# Altium PCB ChassisPowerDistroA_PSoC_1.1_GK.PcbDoc (part 2 of 2)
Units mil, origin at the board's own origin, x right, y up, seen from the top; angles counter-clockwise.
Board outline 6000 x 4000 mil, 4 copper layers (Top Layer, Int1 (GND), Int2 (PWR), Bottom Layer), stack 55.4 mil thick; 197 components, 92 nets, 574 pads, 132 vias.
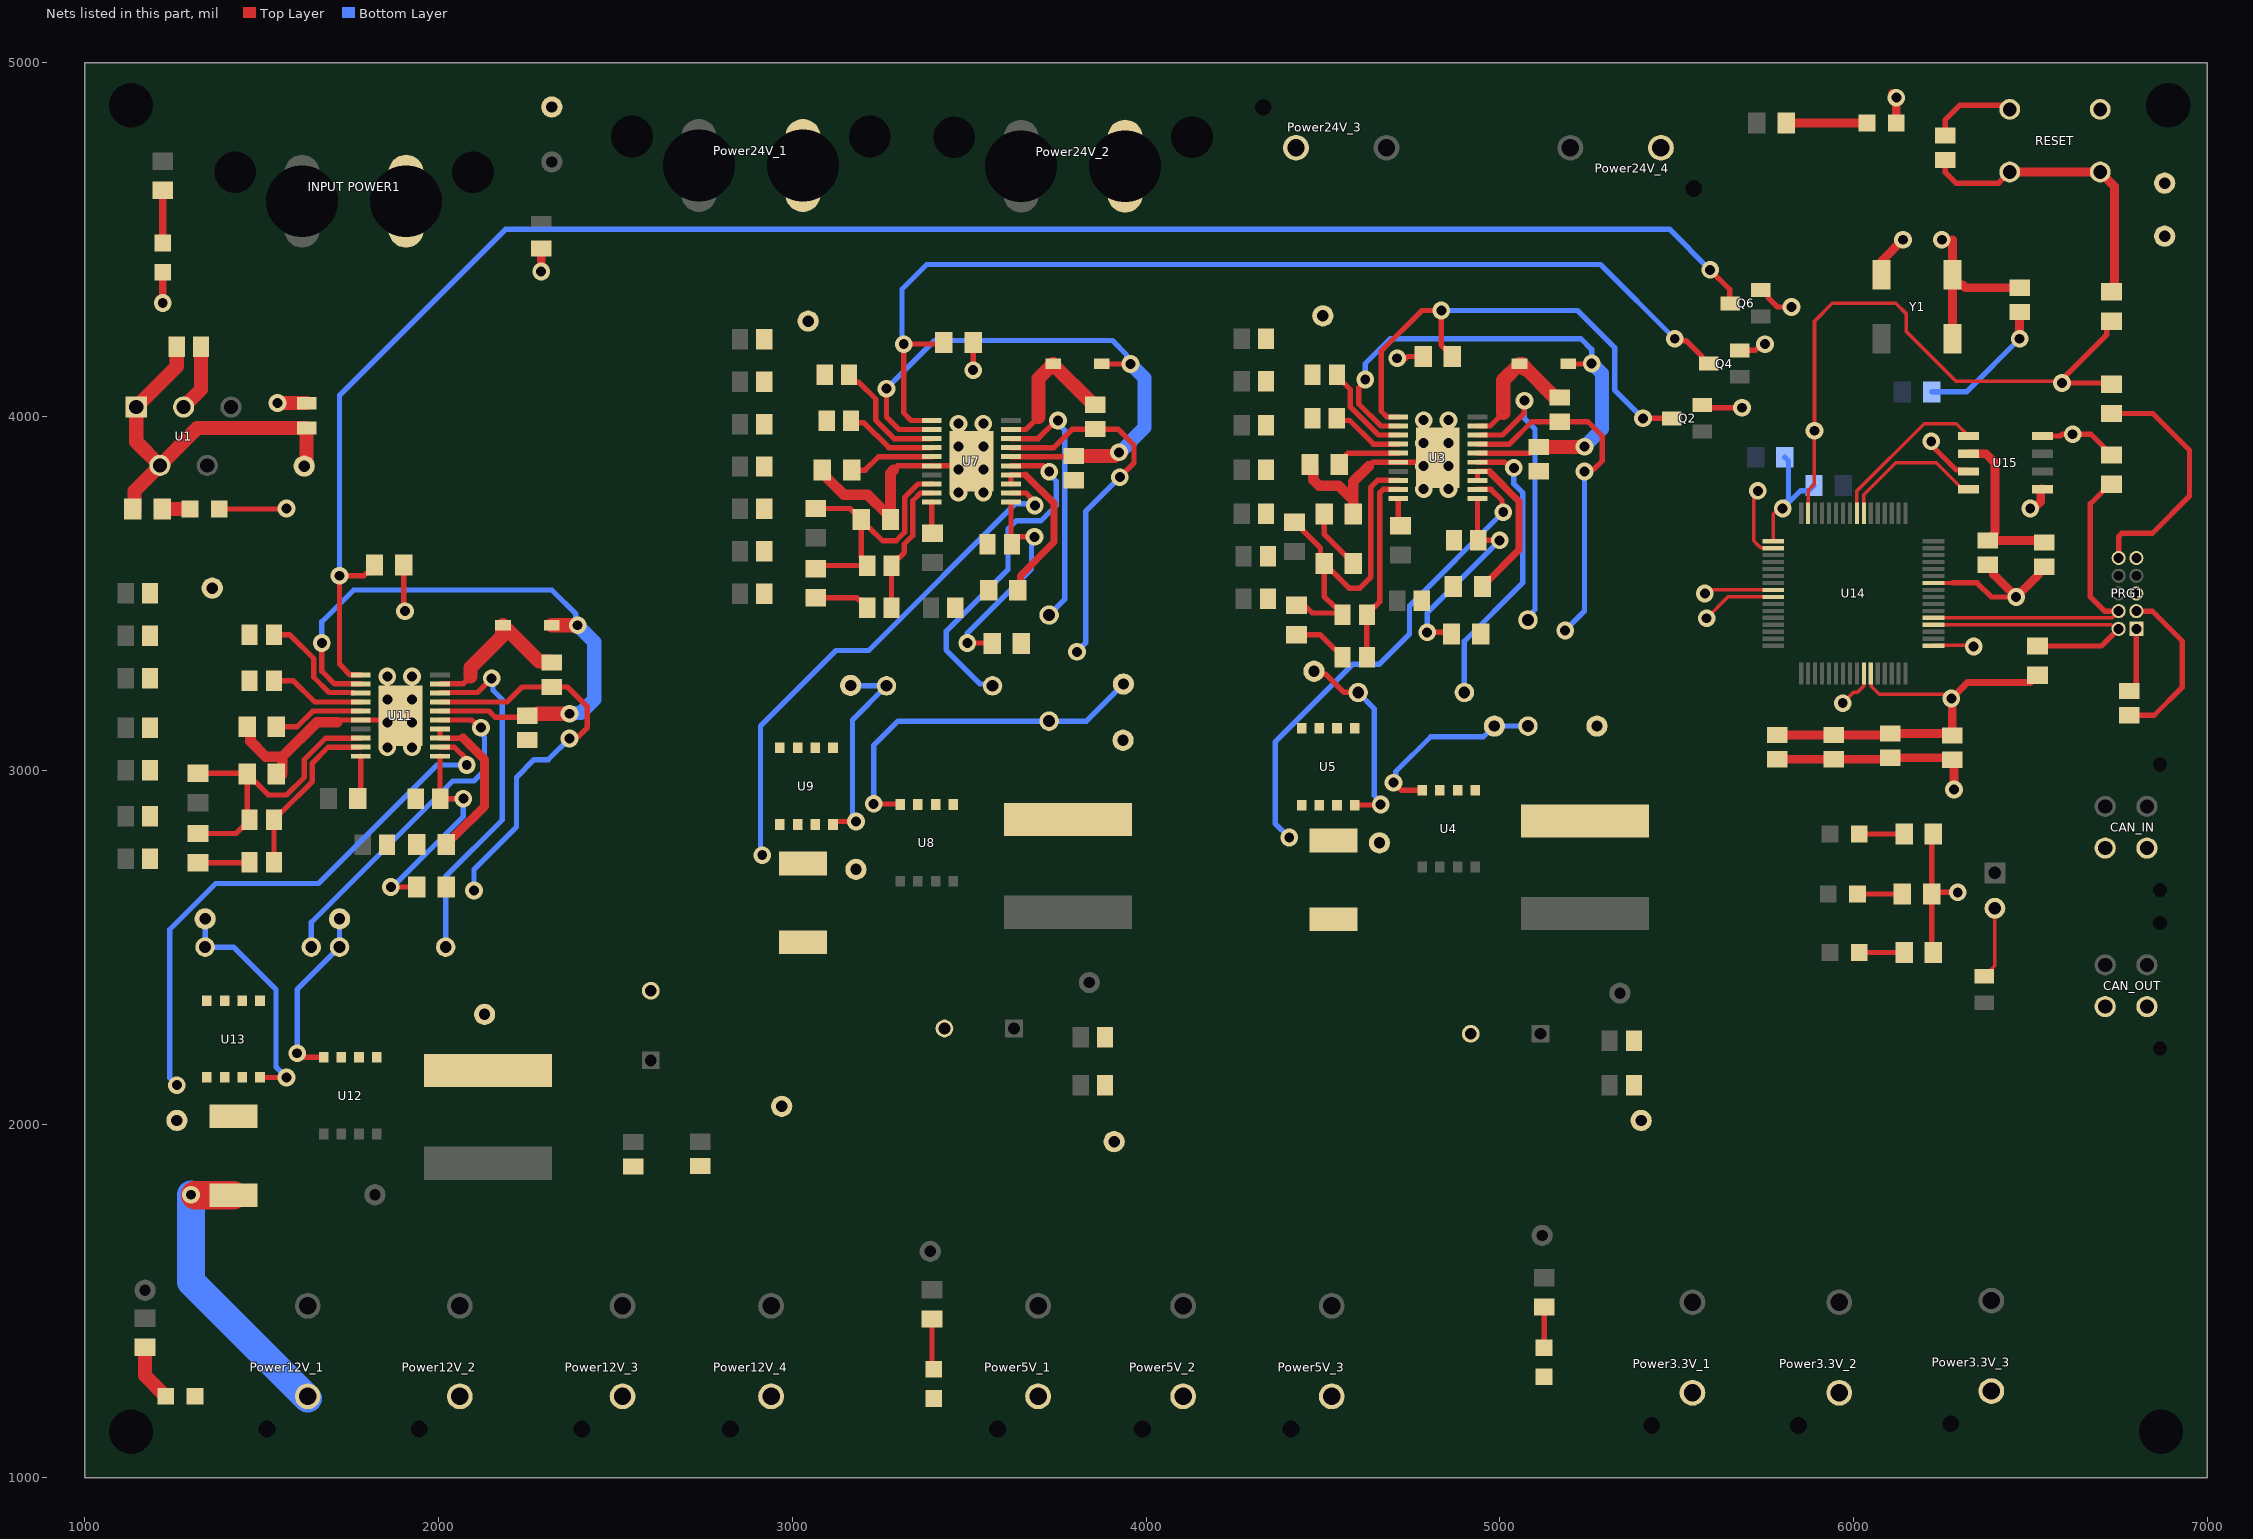
[diagram p4: the nets of this part, all layers, seen from the top]

## Via types
v1: diameter 50, hole 28, Top Layer to Bottom Layer, 132 vias

## Nets (pads, with @x,y where several pads share a name; then routed paths per layer and width w, separated by ;. In a path a pad name is that pad's centre, name@x,y a point inside that pad or via, vN(x,y) a via of type N, cw(c..) or ccw(c..) an arc to the next point about the centre after c; other vN are vias at no path point) (continued)
GND: 24V_OUT.NEG "INPUT POWER1.2" C1.1 C4.1 C5.1 C6.1 C7.1 C8.1 C9.1 C10.1 C12.1 C15.1 C16.1 C17.1 C22.1 C23.1 C24.1 C25.1 C26.1 C27.1 C28.1 C30.1 C33.1 C34.1 C35.1 C40.1 C41.1 C42.1 C43.1 C44.1 C45.1 C46.1 C50.1 C51.1 C52.1 C53.1 C56.2 C57.2 C58.2 C59.2 C60.1 C65.1 C66.1 C67.1 CAN_IN.1 CAN_OUT.1 GND.1 IN_P.NEG LP.NEG Power24V_1.2 Power24V_2.2 Power24V_3.2 Power24V_4.2 PRG1.3 PRG1.5 PRG1.9 Q2.2 Q4.2 Q6.2 R8.1 R10.1 R19.1 R21.1 R30.1 R33.1 R44.2 R46.1 R47.1 R48.1 R49.2 R50.2 R51.2 RESET.1 RESET.2 TP10.1 TP21.1 TP32.1 TP37.1 U1.3 U3.6 U3.21 U7.6 U7.21 U11.6 U11.21 U14.10 U14.17 U14.49 U14.57 U15.8 Y1.2 | length 5561
  Top Layer w10: v1(5585,3430) 5645.16,3490.16 U14.57@5773.62,3490.16 ; U14.49@5773.62,3647.64 5773.62,3723.62 5800,3750 v1(5800,3740) ; v1(5970,3190) 6000.4,3220.4 6011.42,3220.4 6028.75,3237.73 6028.75,3272.84 U14.10@6029.53,3273.62 ; U14.17@6226.38,3352.36 6227.16,3353.14 6336.86,3353.14 v1(6340,3350)
  Top Layer w15: LP.NEG@1379.68,3738.66 1568.66,3738.66 v1(1570,3740) ; R33.1@1458.66,3123 R33.1@1468.27,3113.39 ; 1713.98,3136.02 1720,3142.05 U11.6@1780,3142.05 1879.2,3142.05 U11.21@1892,3154.84 ; R21.1@3084.88,3848.94 3101.99,3831.83 R21.1@3101.99,3823.17 ; C33.1@3091.77,4118.94 C33.1@3097.32,4113.38 ; 3286.22,3848.94 3298.27,3860.98 U7.6@3394.22,3860.98 3493.43,3860.98 U7.21@3506.22,3873.78 ; C10.1@4340,3480.55 C10.1@4344.45,3485 ; R10.1@4463.66,3865 R10.1@4473.24,3855.42 ; 4630,3860 4640.98,3870.98 U3.6@4713,3870.98 4812.2,3870.98 U3.21@4825,3883.78 ; Q2.2@5573.31,4032.4 5580.71,4025 v1(5685,4025) ; Q4.2@5678.31,4187.4 5722.4,4187.4 5740,4205 v1(5750,4205) ; Q6.2@5738.31,4357.4 5746.18,4357.4 5758.37,4345.22 5758.37,4336.63 5785,4310 v1(5825,4310) ; C67.1@6260,4794.45 6260,4840 6300,4880 6430.63,4880 RESET.1@6442.05,4868.58 ; U15.8@6534.33,3945 6585,3945 6590,3950 v1(6620,3950) 6671.34,3950 6707.97,3913.37 6707.97,3908.44 6725.08,3891.34 R44.2@6730,3891.34 ; C65.1@6780,3155.55 6850.55,3155.55 6930,3235 6930,3365 6845,3450 PRG1.3@6800,3450
  Top Layer w20: v1(1220,4321) IN_P.NEG@1220,4408.32
  Top Layer w25: v1(2290,4410) C66.1@2290,4475.55 ; C59.2@5784.45,3031.1 C58.2@5944.45,3031.1 6100,3031.1 C57.2@6104.45,3035.55 6273.66,3035.55 C56.2@6279.45,3029.76 6274.45,3024.76 6284.45,3014.76 v1(6284.45,2945.55) ; Y1.2@6080,4401.1 6080,4440 v1(6140,4500) ; v1@6110,4913.24 v1(6121.34,4901.9) 24V_OUT.NEG@6121.34,4830 ; v1(6470,4220) C60.1@6470,4295.55
  Top Layer w30: R33.1@1468.27,3113.39 1468.27,3081.73 1511.63,3038.37 1558.37,3038.37 ; R30.1@1557,2986.34 1557,2990 1558.37,2991.37 1558.37,3038.37 ; 1713.98,3136.02 1656.02,3136.02 1558.37,3038.37 ; R21.1@3101.99,3823.17 3146.22,3778.94 3212.48,3778.94 3267.95,3723.46 R19.1@3277.56,3713.86 ; R19.1@3277.56,3723.46 3277.56,3840.27 3286.22,3848.94 ; R10.1@4473.24,3855.42 4473.24,3821.76 4490,3805 4545,3805 4576.78,3773.22 ; R8.1@4586.34,3725 4586.34,3816.34 4630,3860
  Top Layer w40: U1.3@1279,4027 1328.45,4076.45 C1.1@1328.45,4197
  Bottom Layer w15: R50.2@5806.34,3885 5816.34,3875 5816.34,3765.81 5800,3749.47 v1(5800,3740) 5850.34,3790.34 5874,3790.34 R49.2@5888.66,3805 ; R51.2@6221.34,4070 6320,4070 v1(6470,4220)
  other v1: 1855,3065 1925,3065 1855,3135 1925,3135 1855,3200 1925,3200 1855,3265 1925,3265 3470,3785 3540,3785 4785,3795 4855,3795 3470,3850 3540,3850 4785,3860 4855,3860 3470,3915 3540,3915 4785,3925 4855,3925 3470,3980 3540,3980 4785,3990 4855,3990
GND2: 12V_Power.NEG C38.1 C47.2 C48.1 C49.1 Power12V_1.2 Power12V_2.2 Power12V_3.2 Power12V_4.2 R32.1 R46.2 TP33.1 U11.13 U11.14 | length 1251.8
  Top Layer w15: U11.14@2004,3116.46 U11.13@2004,3090.87 2069.13,3090.87
  Top Layer w25: R46.2@2043.37,2812.03 2130,2898.66 2130,3030 2069.13,3090.87
  Top Layer w80: v1@1311.46,1798.54 R32.1@1420,1798.54
  Bottom Layer w80: v1(1300,1800) 1300,1554.09 Power12V_1.2@1630,1224.09
GND3: 5V_Power.NEG C20.1 C29.2 C31.1 C32.1 Power5V_1.2 Power5V_2.2 Power5V_3.2 R22.1 R47.2 TP22.1 U7.13 U7.14 | length 469.2
  Top Layer w15: U7.13@3618.22,3809.8 U7.14@3618.22,3835.39 3659.61,3835.39 ; R47.2@3637.56,3508.94 3644.92,3516.3 3644.92,3540
  Top Layer w20: 3644.92,3540 3644.92,3549.92 3740,3645 3740,3755 3659.61,3835.39
GND4: 3.3V_Power.NEG C2.1 C11.2 C13.1 C14.1 Power3.3V_1.2 Power3.3V_2.2 Power3.3V_3.2 R11.1 R48.2 TP11.1 U3.13 U3.14 | length 468.3
  Top Layer w15: C11.2@4911.76,2255 C11.2@4918.15,2255 ; U3.13@4937,3819.8 U3.14@4937,3845.39 4969.61,3845.39
  Top Layer w20: R48.2@4951.34,3520 5055,3623.66 5055,3760 4969.61,3845.39
HSG_3.3V: R3.2 TP3.1 U4.4 | length 550.9
  Top Layer w15: v1(4700,2965) 4721.63,2943.37 U4.4@4781,2943.37
  Bottom Layer w15: v1(4700,2965) 4706.09,2971.09 4706.09,2996.09 4805,3095 4953.71,3095 4983.71,3125 R3.2@5080,3125
LSG_3.3V: R4.2 TP4.1 U5.4 | length 566.8
  Top Layer w15: TP4.1@4475,3280 4483.61,3271.39 4508.61,3271.39 4559.6,3220.4 4599.6,3220.4 R4.2@4600,3220 ; U5.4@4590,2901.63 4661.63,2901.63 v1(4663.32,2903.32)
  Bottom Layer w15: R4.2@4600,3220 4645,3175 4645,2929.6 4663.32,2911.29 v1(4663.32,2903.32)
Net3.3V_Power_POS: 3.3V_Power.POS R13.1 | length 115.4
  Top Layer w15: 3.3V_Power.POS@5125,1367.68 5126,1368.68 R13.1@5126,1482.66
Net5V_OUT_1: 5V_OUT.1 C1.2 F1.2 R1.2 U1.1 U1.2 | length 1139.5
  Top Layer w40: R1.2@1135.66,3733.74 1140,3738.08 1140,3790 U1.2@1212,3862 ; C1.2@1259.55,4197 1259.55,4141.55 U1.1@1145,4027 1145,3929 U1.2@1212,3862 ; 5V_OUT.1@1620,3860 1620,3865.41 1627,3872.41 F1.2@1627,3967.75 1317.75,3967.75 U1.2@1212,3862
Net5V_Power_POS: 5V_Power.POS R24.1 | length 144.4
  Top Layer w15: R24.1@3395,1448.66 3395,1311.34 5V_Power.POS@3400,1306.34
Net12V_Power_POS: 12V_Power.POS R35.1 | length 163
  Top Layer w40: R35.1@1170,1368.66 1170,1288.66 12V_Power.POS@1228.66,1230
Net24V_OUT_POS: 24V_OUT.POS R36.1 | length 228.7
  Top Layer w25: R36.1@5810,4830 24V_OUT.POS@6038.66,4830
NetC2_2: C2.2 U2.2 U3.2 U3.16 | length 1629.3
  Top Layer w15: v1(4620,4105) 4620,4100 4601.26,4081.26 4601.26,4036.26 4664.18,3973.35 U3.2@4713,3973.35 ; U3.16@4937,3896.57 5086.02,3896.57 5103.9,3914.45 C2.2@5110,3914.45 ; U2.2@5194,4148.94 5258.94,4148.94 v1(5260,4150) v1@5265,4150 ; v1@5239.45,3914.45 v1(5240,3915)
  Top Layer w40: C2.2@5110,3914.45 v1@5239.45,3914.45 ; v1@5264.05,4147.52 5264.05,4149.43 v1@5264.62,4150
  Bottom Layer w15: v1(4620,4105) 4620,4150 4690,4220 5230,4220 5260,4190 v1(5260,4150)
  Bottom Layer w40: v1(5240,3915) 5289.5,3964.5 5289.5,4121.57 5263.8,4147.27 v1@5264.05,4147.52
NetC3_1: C3.1 L1.1 R5.2 TP7.1 U3.17 U4.1 U4.2 U4.3 U5.5 U5.6 U5.7 U5.8 | length 1001.3
  Top Layer w15: U3.17@4937,3922.16 5027.16,3922.16 5090.55,3985.55 C3.1@5170,3985.55 5249.45,3985.55 5290,3945 5290,3875 5266.7,3851.7 5246.7,3851.7 v1(5240,3845)
  Bottom Layer w15: v1(5185,3395) 5240,3450 v1(5240,3845)
NetC3_2: C3.2 U2.1 U3.19 | length 403.4
  Top Layer w15: U3.19@4937,3973.35 4973.35,3973.35 5010,4010 ; U2.1@5070.5,4134.44 U2.1@5070.5,4141.44
  Top Layer w40: 5010,4010 5010,4102.94 U2.1@5056,4148.94 5063,4148.94 U2.1@5070.5,4141.44 ; U2.1@5070.5,4134.44 5075.56,4134.44 5152.72,4057.28 5167.17,4057.28 C3.2@5170,4054.45
NetC12_2: C12.2 R5.1 U3.11 | length 595.8
  Top Layer w15: v1(4795,3390) 4858.66,3390 R5.1@4863.66,3385 ; U3.11@4937,3768.62 4937,3652.45 C12.2@4939.45,3650 v1(5000,3650)
  Bottom Layer w15: v1(4795,3390) 4795,3445 v1(5000,3650)
NetC15_2: C15.2 U3.4 | length 203.7
  Top Layer w15: C15.2@4539.45,3995 4545.45,3989 4576,3989 4642.84,3922.16 U3.4@4713,3922.16
NetC16_2: C16.2 U3.3 | length 276
  Top Layer w15: C16.2@4540,4118.94 4540,4112.83 4555.33,4097.5 4556.21,4097.5 4577.78,4075.93 4577.78,4027.22 4657.25,3947.75 U3.3@4713,3947.75
NetC18_1: C18.1 R6.1 R7.2 R12.1 U3.8 | length 977.3
  Top Layer w15: R6.1@4420,3701.34 4424.92,3701.34 4442.03,3684.23 4442.03,3679.31 4493.1,3628.24 4493.1,3595.56 R7.2@4503.66,3585 R7.2@4503.66,3580.08 ; R12.1@4425,3466.34 4448.66,3466.34 4470,3445 4550.55,3445 C18.1@4555.55,3440 4555.55,3446.1 4540.22,3461.44 4534.11,3461.44 4503.66,3491.89 R7.2@4503.66,3580.08 ; U3.8@4713,3819.8 4654.8,3819.8 4635,3800 4635,3545 4605,3515 4573.66,3515 4525.69,3562.97 4520.77,3562.97 R7.2@4503.66,3580.08
NetC18_2: C18.2 C19.2 U3.9 | length 547.5
  Top Layer w15: C19.2@4630,3314.45 C19.2@4624.45,3320 C18.2@4624.45,3440 4624.45,3446.1 4639.78,3461.44 4645.89,3461.44 4661.26,3476.81 4661.26,3785.42 4670.05,3794.21 U3.9@4713,3794.21
NetC19_1: C19.1 R12.2 | length 160.5
  Top Layer w15: R12.2@4425,3383.66 4491.89,3383.66 4534.11,3341.44 4540.22,3341.44 4555.55,3326.1 C19.1@4555.55,3320
NetC20_2: C20.2 U6.2 U7.2 U7.16 | length 1694.8
  Top Layer w15: v1(3266.22,4078.94) 3266.22,3998.94 3301.81,3963.35 U7.2@3394.22,3963.35 ; U7.16@3618.22,3886.57 3793.86,3886.57 C20.2@3796.22,3888.94 ; U6.2@3875.22,4148.94 v1(3956.22,4148.94)
  Top Layer w40: C20.2@3796.22,3888.94 3911.02,3888.94 3921.02,3898.94 v1(3923.72,3898.94)
  Bottom Layer w15: v1(3266.22,4078.94) 3402.29,4215 3905,4215 3945.06,4174.94 3945.06,4169.57 3956.22,4158.41 v1(3956.22,4148.94)
  Bottom Layer w40: v1(3923.72,3898.94) 3926.22,3898.94 3996.22,3968.94 3996.22,4108.94 v1(3956.22,4148.94)
NetC21_1: C21.1 L2.1 R17.2 TP18.1 U7.17 U8.1 U8.2 U8.3 U9.5 U9.6 U9.7 U9.8 | length 1039.3
  Top Layer w15: U7.17@3618.22,3912.16 3739.45,3912.16 3791.77,3964.49 C21.1@3856.22,3964.49 3920.67,3964.49 3966.22,3918.94 3966.22,3868.94 v1(3926.22,3828.94)
  Bottom Layer w15: v1(3805,3335) 3805,3336.29 3830,3361.29 3830,3732.71 v1(3926.22,3828.94)
NetC21_2: C21.2 U6.1 U7.19 | length 428.1
  Top Layer w15: U7.19@3618.22,3963.35 3660.63,3963.35 3696.22,3998.94
  Top Layer w40: 3696.22,3998.94 3696.22,4107.94 U6.1@3737.22,4148.94 3737.22,4147.78 3847.28,4037.72 3847.28,4036.22 3850.12,4033.38 C21.2@3856.22,4033.38
NetC30_2: C30.2 R17.1 U7.11 | length 646.1
  Top Layer w15: v1(3495,3360) 3563.82,3360 R17.1@3564.88,3358.94 ; U7.11@3618.22,3758.62 3618.22,3641.38 C30.2@3620.67,3638.94 3620.67,3644.67 3636.01,3660 v1(3685,3660)
  Bottom Layer w15: v1(3495,3360) 3495,3387.71 3676.22,3568.94 3676.22,3638.94 3685,3647.71 v1(3685,3660)
NetC33_2: C33.2 U7.3 | length 347.3
  Top Layer w15: C33.2@3160.67,4118.94 3160.67,4112.83 3176.01,4097.5 3187.66,4097.5 3236.22,4048.94 3236.22,3988.94 3287.4,3937.75 U7.3@3394.22,3937.75
NetC34_2: C34.2 U7.4 | length 259.8
  Top Layer w15: C34.2@3166.22,3988.94 3172.77,3982.39 3202.77,3982.39 3272.99,3912.16 U7.4@3394.22,3912.16
NetC36_1: C36.1 R23.2 | length 161
  Top Layer w15: R23.2@3066.22,3487.6 3183.11,3487.6 3190.34,3480.37 3196.44,3480.37 3211.77,3465.04 C36.1@3211.77,3458.94
NetC36_2: C36.2 C37.2 U7.9 | length 394.2
  Top Layer w15: C36.2@3280.67,3458.94 3280.67,3585.04 3296.01,3600.37 3302.11,3600.37 3316.22,3614.49 3316.22,3639.02 3340.67,3663.46 3340.67,3761.99 3362.89,3784.21 U7.9@3394.22,3784.21
NetC37_1: C37.1 R18.1 R19.2 R23.1 U7.8 | length 774.3
  Top Layer w15: R23.1@3066.22,3570.27 3074.88,3578.94 C37.1@3211.77,3578.94 3211.77,3585.04 3194.88,3601.93 R19.2@3194.88,3704.01 ; R18.1@3066.22,3740.27 3163.54,3740.27 R19.2@3194.88,3708.94 R19.2@3194.88,3704.01 ; U7.8@3394.22,3809.8 3393.72,3809.3 3355.46,3809.3 3317.67,3771.51 3317.67,3672.99 3293.61,3648.94 3254.88,3648.94 3216.91,3686.91 3211.99,3686.91 R19.2@3194.88,3704.01
NetC38_2: C38.2 U10.2 U11.2 U11.16 | length 1838.7
  Top Layer w15: v1(1670,3360) 1670,3280 1705.59,3244.41 U11.2@1780,3244.41 ; U11.16@2004,3167.64 2142.36,3167.64 2160,3150 2245.55,3150 C38.2@2250,3154.45
  Top Layer w40: C38.2@2250,3154.45 2252.83,3157.28 2276.32,3157.28 2279.04,3160 v1@2360,3160 ; U10.2@2320,3410 v1(2393,3410)
  Bottom Layer w15: v1(1670,3360) 1670,3420 1760,3510 2320,3510 2387.91,3442.09 2387.91,3415.09 v1(2393,3410)
  Bottom Layer w40: v1(2370,3160) 2371.91,3161.91 2401.91,3161.91 2440,3200 2440,3363 v1(2393,3410)
NetC39_1: C39.1 L3.1 R28.2 TP29.1 U11.17 U12.1 U12.2 U12.3 U13.5 U13.6 U13.7 U13.8 | length 1149.2
  Top Layer w15: U11.17@2004,3193.23 2193.23,3193.23 2235.55,3235.55 C39.1@2320,3235.55 2364.45,3235.55 2420,3180 2420,3120 2396.7,3096.7 2376.7,3096.7 v1(2370,3090) ; R28.2@2021.34,2670 R28.2@2021.34,2674.92
  Bottom Layer w15: v1(2100,2660) 2100,2720 2220,2840 2220,2980 2270,3030 2310,3030 v1(2370,3090)
NetC39_2: C39.2 U10.1 U11.19 | length 459.4
  Top Layer w15: U11.19@2004,3244.41 2069.41,3244.41 2090,3265
  Top Layer w40: 2090,3265 2090,3290 2180,3380 2180,3408 U10.1@2182,3410 2284.72,3307.28 2317.17,3307.28 C39.2@2320,3304.45
NetC50_2: C50.2 R28.1 U11.11 | length 596.9
  Top Layer w15: v1(1865,2670) R28.1@1938.66,2670 ; U11.11@2004,3039.68 2004,2920.45 C50.2@2004.45,2920 v1(2070,2920)
  Bottom Layer w15: v1(1865,2670) 1870,2670 2070,2870 v1(2070,2920)
NetC51_2: C51.2 U11.3 | length 323.9
  Top Layer w15: C51.2@1534.45,3383 1580,3383 1647,3316 1647,3263 1690,3220 1753.72,3220 1754.4,3219.32 U11.3@1759.5,3219.32
NetC52_2: C52.2 U11.4 | length 270.3
  Top Layer w15: C52.2@1534.45,3253 1590,3253 1649.77,3193.23 U11.4@1780,3193.23
NetC54_1: C54.1 R34.2 | length 146.1
  Top Layer w15: R34.2@1320,2738.66 1464.21,2738.66 C54.1@1465.55,2740
NetC54_2: C54.2 C55.2 U11.9 | length 484.6
  Top Layer w15: C54.2@1534.45,2740 C55.2@1534.45,2860 1534.45,2866.1 1549.78,2881.44 1555.89,2881.44 1643,2968.55 1643,3020.47 1687.8,3065.28 U11.9@1780,3065.28
NetC55_1: C55.1 R29.1 R30.2 R34.1 U11.8 | length 894.4
  Top Layer w15: R34.1@1320,2821.34 1426.89,2821.34 1444.11,2838.56 1450.22,2838.56 1465.55,2853.9 C55.1@1465.55,2860 1458.66,2866.89 R30.2@1458.66,2985.08 ; R29.1@1332.11,2979.23 R29.1@1320,2991.34 1457.32,2991.34 R30.2@1458.66,2990 R30.2@1458.66,2985.08 ; U11.8@1780,3090.87 1680.87,3090.87 1620,3030 1620,2980 1570,2930 1518.66,2930 1480.69,2967.97 1475.77,2967.97 R30.2@1458.66,2985.08
NetC61_1: C61.1 C62.1 U15.2 | length 472.7
  Top Layer w25: U15.2@6325.67,3895 6375,3895 6400,3870 6400,3670 6396.44,3666.44 6396.44,3660.33 C62.1@6386.1,3650 ; C62.1@6380,3650 C62.1@6386.1,3650 ; C61.1@6540,3644.45 6534.45,3650 C62.1@6386.1,3650
NetC67_2: C67.2 R38.1 RESET.3 RESET.4 | length 857.5
  Top Layer w15: C67.2@6260,4725.55 6260,4690 6290,4660 6410.63,4660 RESET.3@6442.05,4691.42
  Top Layer w25: RESET.3@6442.05,4691.42 RESET.4@6697.95,4691.42 6737.95,4651.42 6737.95,4360.63 R38.1@6730,4352.68
NetFLT_3.3V_POS: FLT_3.3V.POS R39.1 | length 126
  Top Layer w15: FLT_3.3V.POS@6016.34,2820 R39.1@6142.32,2820
NetFLT_5V_POS: FLT_5V.POS R40.1 | length 127.3
  Top Layer w15: FLT_5V.POS@6011.34,2650 R40.1@6138.66,2650
NetFLT_12V_POS: FLT_12V.POS R41.1 | length 131.5
  Top Layer w15: FLT_12V.POS@6016.34,2485 6133.66,2485 R41.1@6143.66,2495
NetHSG_5V_1: HSG_5V.1 R15.2 U8.4 | length 1018.9
  Top Layer w15: v1(3230,2905) 3303.37,2905 U8.4@3305,2903.37
  Bottom Layer w15: v1(3230,2905) 3230,3070 3298.94,3138.94 R15.2@3726.22,3138.94 3831.22,3138.94 HSG_5V.1@3936.22,3243.94
NetHSG_12V_1: HSG_12V.1 R26.2 U12.4 | length 523.9
  Top Layer w15: v1@1610,2200 1621.63,2188.37 U12.4@1675,2188.37 ; HSG_12V.1@1711.39,2571.39 HSG_12V.1@1720,2580
  Bottom Layer w15: v1(1600,2200) 1600,2380 R26.2@1720,2500 HSG_12V.1@1720,2580 HSG_12V.1@1728.61,2588.61
NetIN_P_POS: IN_P.POS R37.1 | length 148.7
  Top Layer w20: IN_P.POS@1220,4491 R37.1@1220,4639.66
NetLP_POS: LP.POS R1.1 | length 78.7
  Top Layer w40: R1.1@1218.34,3738.66 LP.POS@1297,3738.66
NetLSG_5V_1: LSG_5V.1 R16.2 U9.4 | length 606.5
  Top Layer w15: U9.4@3115,2846.63 3116.63,2845 3126.63,2855 v1(3180,2855)
  Bottom Layer w15: LSG_5V.1@3166.05,3238.94 R16.2@3266.22,3238.94 3170,3142.71 3170,2871.29 3173.3,2867.98 3173.3,2851.7 3176.61,2855 v1(3180,2855)
NetLSG_12V_1: LSG_12V.1 R27.2 U13.4 | length 664
  Top Layer w15: U13.4@1495,2131.63 U13.4@1501,2131.63 ; U13.4@1502.5,2131.63 v1(1570,2131.63)
  Bottom Layer w15: LSG_12V.1@1340,2580 R27.2@1340,2500 1420,2500 1540,2380 1540,2161.63 v1(1570,2131.63)
NetP1_2: P1.2 R42.1 | length 205
  Top Layer w10: R42.1@6370,2417.4 6400,2447.4 P1.2@6400,2610
NetPRG1_10: PRG1.10 R45.2 | length 701.3
  Top Layer w15: R45.2@6730,4008.66 6846.34,4008.66 6950,3905 6950,3775 6845,3670 6758.79,3670 6750,3661.21 PRG1.10@6750,3600
NetR3_1: R3.1 U3.18 | length 834.5
  Top Layer w15: U3.18@4937,3947.75 5007.75,3947.75 5068.91,4008.91 5068.91,4043.91 v1(5070,4045)
  Bottom Layer w15: v1(5070,4045) 5070,3995 5100,3965 5100,3453.85 5080,3433.85 R3.1@5080,3425
NetR4_1: R4.1 U3.15 | length 823.3
  Top Layer w15: U3.15@4937,3870.98 5014.55,3870.98 5030.53,3855 v1(5040,3855)
  Bottom Layer w15: R4.1@4900,3220 4900,3365 5065,3530 5065,3785 5040,3810 v1(5040,3855)
NetR7_1: R7.1 R8.2 | length 177.1
  Top Layer w15: R8.2@4503.66,3725 4503.66,3667.68 4564.31,3607.03 4569.23,3607.03 4586.34,3589.92 R7.1@4586.34,3585
NetR9_1: R9.1 U3.10 | length 82.9
  Top Layer w15: U3.10@4713,3768.62 4713,3697 4720,3690 R9.1@4720,3691.34
NetR10_2: R10.2 U3.5 | length 165.7
  Top Layer w15: R10.2@4554.21,3880 4570.79,3896.57 U3.5@4713,3896.57
NetR11_2: R11.2 TP9.1 U3.12 U5.1 U5.2 U5.3 | length 1364.8
  Top Layer w15: U3.12@4937,3794.21 4975.79,3794.21 5006.41,3763.59 5006.41,3733.59 v1(5010,3730)
  Bottom Layer w15: v1(4405,2810) 4365,2850 4365,3080 4585,3300 4660,3300 4745,3385 4745,3465 v1(5010,3730)
NetR15_1: R15.1 U7.18 | length 730.1
  Top Layer w15: U7.18@3618.22,3937.75 3695.04,3937.75 3746.22,3988.94 v1(3751.22,3988.94)
  Bottom Layer w15: R15.1@3726.22,3438.94 3770,3482.71 3770,3962.2 3751.22,3980.98 v1(3751.22,3988.94)
NetR16_1: R16.1 U7.15 | length 970.4
  Top Layer w15: U7.15@3618.22,3860.98 3709.17,3860.98 3725.89,3844.26 v1(3726.55,3844.26)
  Bottom Layer w15: R16.1@3566.22,3238.94 3560.9,3244.25 3530.75,3244.25 3435,3340 3435,3392.71 3609.58,3567.3 3609.58,3681.85 3633.31,3705.57 3702.86,3705.57 3746.22,3748.94 3746.22,3817.65 3726.55,3837.32 v1(3726.55,3844.26)
NetR20_1: R20.1 U7.10 | length 89.2
  Top Layer w15: U7.10@3394.22,3758.62 3394.22,3672.27 R20.1@3396.22,3670.27
NetR21_2: R21.2 U7.5 | length 232.7
  Top Layer w15: R21.2@3177.22,3848.59 3205.88,3848.59 3243.86,3886.57 U7.5@3394.22,3886.57
NetR22_2: R22.2 TP20.1 U7.12 U9.1 U9.2 U9.3 | length 1494.3
  Top Layer w15: U7.12@3618.22,3784.21 3660.95,3784.21 3679.04,3766.12 3679.04,3755.15 v1(3685.74,3748.45)
  Bottom Layer w15: v1(2915,2760) 2910,2765 2910,3125 3123.94,3338.94 3216.22,3338.94 3631.22,3753.94 3680.25,3753.94 v1(3685.74,3748.45)
NetR26_1: R26.1 U11.18 | length 1001.4
  Top Layer w15: U11.18@2004,3220 2110.2,3220 2150,3259.8 v1(2150,3260)
  Bottom Layer w15: R26.1@2020,2500 2020,2700 2180,2860 2180,3200 2153.59,3226.41 2153.59,3256.41 v1(2150,3260)
NetR27_1: R27.1 U11.15 | length 987.7
  Top Layer w15: U11.15@2004,3142.05 2093.71,3142.05 2115.26,3120.5 v1(2120,3120.5)
  Bottom Layer w15: R27.1@1640,2500 1640,2570 2040,2970 2100,2970 2130,3000 2130,3094.21 2126.7,3097.52 2126.7,3113.8 v1(2120,3120.5)
NetR31_1: R31.1 U11.10 | length 133.3
  Top Layer w15: R31.1@1771.34,2910 1780,2918.66 U11.10@1780,3039.69
NetR32_2: R32.2 TP31.1 U11.12 U13.1 U13.2 U13.3 | length 1596.3
  Top Layer w15: U11.12@2004,3065.28 2044.72,3065.28 2080,3030 2079.5,3029.5 v1(2079.5,3015)
  Bottom Layer w15: TP31.1@1260,2010 TP31.1@1267.12,2017.12 ; v1(1260,2110) 1240,2130 1240,2550 1370,2680 1660,2680 1995,3015 v1(2079.5,3015)
NetR33_2: R33.2 U11.5 | length 257.2
  Top Layer w15: R33.2@1541.34,3123 1599.87,3123 1644.5,3167.64 U11.5@1780,3167.64
RX: U14.39 U15.4 | length 417.8
  Top Layer w10: U14.39@6029.53,3726.38 6029.53,3779.53 6120,3870 6234.07,3870 6309.07,3795 U15.4@6325.67,3795
SWDCLK: PRG1.4 R44.1 U14.21 | length 1005.7
  Top Layer w10: U14.21@6226.38,3431.1 6731.1,3431.1 PRG1.4@6750,3450
  Top Layer w15: R44.1@6702.97,3786.56 R44.1@6725.08,3808.66 ; R44.1@6730,3808.66 R44.1@6725.08,3808.66 ; PRG1.4@6750,3450 6710,3450 6670,3490 6670,3753.58 R44.1@6725.08,3808.66
SWDIO: PRG1.2 R43.2 U14.20 | length 769
  Top Layer w10: U14.20@6226.38,3411.42 6729.11,3411.42 PRG1.2@6740.53,3400
  Top Layer w15: R43.2@6520,3351.34 6701.34,3351.34 6745.26,3395.26 PRG1.2@6750,3400
TX: U14.40 U15.1 | length 472.6
  Top Layer w10: U14.40@6009.84,3726.38 6009.84,3789.84 6200,3980 6290.67,3980 U15.1@6325.67,3945
UVLO_3.3V: Q2.3 R2.1 U3.1 | length 1424.4
  Top Layer w15: U3.1@4713,3998.94 4681.06,3998.94 4665,4015 4665,4185 4780,4300 v1(4835,4300) 4835,4201.34 4844.31,4192.03 4849.23,4192.03 4866.34,4174.92 R2.1@4866.34,4170 ; v1(5405,3995) Q2.3@5486.69,3995
  Bottom Layer w15: v1@4847.05,4300 5220,4300 5325,4195 5325,4075 v1(5405,3995)
UVLO_5V: Q4.3 R14.1 U7.1 | length 2987
  Top Layer w15: U7.1@3394.22,3988.94 3336.06,3988.94 3315,4010 v1(3315,4205) 3423.66,4205 R14.1@3428.66,4210 ; v1(5495,4220) 5500.24,4214.76 5526.93,4214.76 5571.63,4170.06 5571.63,4162.19 5583.82,4150 Q4.3@5591.69,4150
  Bottom Layer w15: v1(3315,4205) 3310,4210 3310,4360 3380,4430 5285,4430 v1(5495,4220)
UVLO_12V: Q6.3 R25.1 U11.1 | length 5183.6
  Top Layer w15: U11.1@1780,3270 1750,3270 1720,3300 v1(1720,3550) 1788.66,3550 1796.63,3557.97 1801.56,3557.97 1818.66,3575.08 R25.1@1818.66,3580 ; v1@5596.39,4415 v1(5595,4415) 5650,4360 5650,4321.69 Q6.3@5651.69,4320
  Bottom Layer w15: v1(1720,3550) 1720,4060 2190,4530 5480,4530 v1(5595,4415)
VCC: C56.1 C57.1 C58.1 C59.1 C60.2 C61.2 C62.2 C65.2 CAN_IN.2 CAN_OUT.2 F1.1 PRG1.1 R2.2 R14.2 R25.2 R39.2 R40.2 R41.2 R43.1 TP36.1 U14.11 U14.26 U14.50 U14.56 U15.3 U15.5 Y1.1 Y1.4 | length 3725.8
  Top Layer w10: v1(5580,3500) 5580,3510 U14.56@5773.46,3510 ; v1(5730,3790) 5730,3779.18 5717.93,3767.11 5717.93,3648.54 5730.11,3636.35 5737.73,3628.73 5772.84,3628.73 U14.50@5773.62,3627.95 ; U14.11@6049.21,3273.62 6049.99,3272.84 6049.99,3237.73 6072.72,3215 6254.18,3215 6266.12,3203.05 v1(6276.95,3203.05) ; U14.26@6226.38,3529.53 6279.53,3529.53
  Top Layer w15: v1@1901.34,3450 R25.2@1901.34,3580 ; v1(3511.34,4131.34) R14.2@3511.34,4210 ; v1(4710,4165) 4710,4160 4720,4150 4740,4170 R2.2@4783.66,4170 ; v1(6220,3930) 6226.7,3923.3 6226.7,3913.3 6290.69,3849.31 6321.36,3849.31 U15.3@6325.67,3845 ; R41.2@6226.34,2485 6221.34,2490 R40.2@6221.34,2650 ; R39.2@6226.34,2820 6221.34,2815 R40.2@6221.34,2650 ; 6280,3530 6350,3530 6390,3490 v1(6460,3490) ; v1(6295,2655) 6226.34,2655 R40.2@6221.34,2650 ; C65.2@6780,3224.45 6800,3244.45 PRG1.1@6800,3400
  Top Layer w20: v1(6276.95,3203.05) 6322.56,3248.66 6500,3248.66 R43.1@6520,3268.66
  Top Layer w25: C59.1@5784.45,3100 C58.1@5944.45,3100 6100,3100 C57.1@6104.45,3104.45 6273.66,3104.45 C56.1@6279.45,3098.66 6279.45,3200.55 v1(6276.95,3203.05) ; Y1.4@6280,4220 Y1.1@6280,4385.35 ; 6280,4500 Y1.1@6280,4401.1 Y1.1@6280,4385.35 ; C62.2@6380,3581.1 6386.1,3581.1 6396.44,3570.77 6396.44,3553.56 v1(6460,3490) 6523.56,3553.56 6523.56,3565.22 6533.9,3575.55 C61.2@6540,3575.55 ; C60.2@6470,4364.45 6316.65,4364.45 6308.84,4372.26 6293.09,4372.26 Y1.1@6280,4385.35 ; v1@6520,3750 6529.64,3759.64 6529.64,3794.31 6530.33,3795 U15.5@6534.33,3795
  Top Layer w40: v1(1544.75,4038.25) F1.1@1627,4038.25
  other v1: 1905,3450 6500,3740 6250,4500
XRES: R38.2 R45.1 U14.47 | length 1773.8
  Top Layer w10: U14.47@5872.05,3726.38 5872.05,3792.05 5889.5,3809.5 5889.5,3959.5 v1(5890,3960) 5890,4270 5940,4320 6120,4320 6150,4290 6150,4240 6290,4100 6585,4100 v1(6590,4095) ; R38.2@6726.25,4266.25 R38.2@6730,4270
  Top Layer w15: R38.2@6726.25,4266.25 6716.68,4256.68 6716.68,4231.68 6596.7,4111.7 6596.7,4101.7 v1(6590,4095) 6726.34,4095 R45.1@6730,4091.34
  Bottom Layer w10: v1(6590,4095) v1@6590,4100
pads on no net: "INPUT POWER1." CAN_IN. CAN_IN.7 CAN_OUT. CAN_OUT.7 Power3.3V_1.9 Power3.3V_2.9 Power3.3V_3.9 Power5V_1.9 Power5V_2.9 Power5V_3.9 Power12V_1.9 Power12V_2.9 Power12V_3.9 Power12V_4.9 Power24V_1. Power24V_2. Power24V_3.9 Power24V_4.9 PRG1.6 PRG1.7 PRG1.8 U1.4 U3.7 U7.7 U11.7 U14.1 U14.2 U14.3 U14.4 U14.5 U14.6 U14.7 U14.8 U14.9 U14.12 U14.13 U14.14 U14.15 U14.16 U14.18 U14.19 U14.22 U14.23 U14.24 U14.25 U14.27 U14.28 U14.29 U14.30 U14.34 U14.35 U14.36 U14.37 U14.38 U14.41 U14.42 U14.43 U14.44 U14.46 U14.48 U14.51 U14.52 U14.58 U14.59 U14.60 U14.64

## Polygon pours and split planes (outlines as drawn)
NetC39_1 on Top Layer "Top Layer-NetC39_1" (solid, pour order 185): 1195,2170 1300,2170 1300,2330 1530,2330 1530,2220 1710,2220 1710,2160 1860,2160 1860,2220 1960,2220 1960,2100 2320,2100 2320,2700 1990,2700 1990,2430 1195,2430 1195,2340
GND4 on Top Layer "Top Layer-GND4" (solid, pour order 184): 4215,2525 4520,2525 4800,2245 4800,1060 6730,1060 6730,1265 6920,1265 6920,2180 6605,2180 6605,2265 6310,2265 6310,2425 5810,2425 5810,2975 5720,2975 5720,3225 5720,3375 5535,3375 5535,3880 5080,3880 5075,3885 5075,3595 4930,3595 4915,3610 4915,3455 5295,3455 5440,3310 5440,2940 5505,2940 5505,2265 5355,2265 5355,1960 6535,1960 6535,1410 6540,1405 4980,1405 4980,2670 4215,2670
GND3 on Top Layer "Top Layer-GND3" (solid, pour order 183): 2895,2515 3150,2260 3150,1060 4770,1060 4770,2240 4705,2305 4510,2500 4190,2500 4190,3730 4075,3845 3767.63,3845 3765,3842.37 3765,3540 3610,3540 3610,3470 3790,3470 4040,3220 4040,2305 3865,2305 3865,1875 4635,1875 4635,1335 3280,1335 3280,2020 3505,2020 3505,2580 2895,2580
+12 on Top Layer "Top Layer-+12" (solid, pour order 181): 1050,1390 3020,1390 3020,1700 2470,1700 2470,1930 2810,1930 2810,2270 2380,2270 2380,1820 2320,1820 2320,1940 1960,1940 1960,1820 1050,1820
GND2 on Top Layer "Top Layer-GND2" (solid, pour order 180): 1270,1060 3130,1060 3130,2240 2870,2500 2840,2500 2680,2500 2680,3110 2190,3110 2160,3080 2160,2830 1990,2830 1990,2730 2350,2730 2350,2500 2350,2300 2840,2300 2840,1910 2500,1910 2500,1720 3050,1720 3050,1360 1270,1360
GND on Top Layer "Top Layer-GND" (solid, pour order 179): 1160,2690 1260,2690 1260,3080 1500,3080 1500,3570 1160,3570
+24V_Input on Top Layer "Top Layer-+24V_Input" (solid, pour order 178): 4215,2700 4360,2700 4360,3440 4295,3440 4295,4350 6635,4350 6635,4950 1250,4950 1250,4768 1038,4768 1038,3620 1038,1920 1147,1920 1147,3590 1499,3590 1499,3810 2705,3810 2705,2520 2875,2520 2875,3855 2865,3855 2865,4350 4075,4350 4075,3880 4215,3740 4215,3440
NetC3_1 on Top Layer "NETC3_1_L01_P163" (solid, pour order 163): 4390,3255 4925,3255 4925,3425 4930,3430 5290,3430 5420,3300 5420,2810 5065,2810 5060,2815 5060,2935 5000,2935 5000,2920 4745,2920 4745,2940 4390,2940
+3.3 on Top Layer "+3.3_L01_P166" (solid, pour order 166): 5420,2645 5420,2520 5480,2520 5480,2290 5335,2290 5335,1930 5335,1925 5335,1920 6500,1920 6500,1430 5225,1430 5225,1545 5010,1545 5010,2520 5007.5,2522.5 5010,2525 5060,2525 5060,2645
NetR11_2 on Top Layer "NETR11_2_L01_P162" (solid, pour order 162): 4390,2920 4565,2920 4565,2870 4705,2870 4705,2685 4390,2685
no net on Top Layer "NONET_L01_P161" (solid, pour order 161): 4635,2870
NetR22_2 on Top Layer "NETR22_2_L01_P151" (solid, pour order 151): 2900,2865 3090,2865 3090,2815 3230,2815 3230,2660 2900,2660
GND on Top Layer "GND_L01_P156" (solid, pour order 156): 4755,4115 4895,4115 4895,3440 4755,3440
no net on Top Layer "NONET_L01_P157" (solid, pour order 157): 4215,3435
GND on Top Layer "GND_L01_P155" (solid, pour order 155): 4315,3450 4370,3450 4370,3830 4495,3830 4495,4170 4505,4160 4565,4160 4565,4335 4315,4335
no net on Top Layer "NONET_L01_P152" (solid, pour order 152): 3150,2780
+5 on Top Layer "+5_L01_P148" (solid, pour order 148): 4610,1360 3480,1360 3485,1365 3485,1505 3305,1505 3305,1990 3530,1990 3530,2525 3595,2525 3595,2645 3960,2645 3960,2525 4015,2525 4015,2330 3845,2330 3845,1850 4610,1850
NetC21_1 on Top Layer "NETC21_1_L01_P146" (solid, pour order 146): 3805,3395 3975,3225 3975,2815 3600,2815 3600,2935 3595,2940 3540,2940 3540,2880 3335,2880 3335,2935 3150,2935 3150,3052.57 2930,3052.57 2930,2885 2900,2885 2900,3195 3625,3195 3625,3390 3620,3395
no net on Top Layer "NONET_L01_P143" (solid, pour order 143): 3591.22,3843.94
no net on Top Layer "NONET_L01_P136" (solid, pour order 136): 3895,2470
no net on Top Layer "NONET_L01_P134" (solid, pour order 134): 3280,3070
GND on Top Layer "GND_L01_P125" (solid, pour order 125): 3436.22,4065 3576.22,4065 3576.22,3428.94 3436.22,3428.94
GND on Top Layer "GND_L01_P123" (solid, pour order 123): 2896.22,4328.94 3116.22,4328.94 3116.22,4318.94 3116.22,3788.94 2976.22,3788.94 2976.22,3428.94 2896.22,3428.94
GND on Top Layer "gnd" (solid, pour order 97): 1820,3390 1960,3390 1960,2730 1820,2730
no net on Top Layer "NONET_L01_P116" (solid, pour order 116): 1580,3470
no net on Top Layer "NONET_L01_P106" (solid, pour order 106): 2000,2840
no net on Top Layer "NONET_L01_P105" (solid, pour order 105): 2000,2840
NetR32_2 on Top Layer "NETR32_2_L01_P104" (solid, pour order 104): 1195,2150 1470,2150 1470,2100 1530,2100 1530,1960 1195,1960
no net on Top Layer "NONET_L01_P102" (solid, pour order 102): 2020,2230
no net on Top Layer "NONET_L01_P098" (solid, pour order 98): 2290,3470
no net on Top Layer "NONET_L01_P094" (solid, pour order 94): 1590,3050
no net on Top Layer "NONET_L01_P086" (solid, pour order 86): 12377,2716
no net on Top Layer "NONET_L01_P075" (solid, pour order 75): 1665,3135.95
no net on Top Layer "NONET_L01_P074" (solid, pour order 74): 1830,3138
no net on Top Layer "NONET_L01_P073" (solid, pour order 73): 1665,3135.95
no net on Top Layer "NONET_L01_P045" (solid, pour order 45): 3196.22,3318.94
no net on Top Layer "NONET_L01_P034" (solid, pour order 34): 3206.22,3228.94
no net on Top Layer "NONET_L01_P025" (solid, pour order 25): 2875,1715
no net on Top Layer "NONET_L01_P016" (solid, pour order 16): 1270,4970
no net on Top Layer "NONET_L01_P013" (solid, pour order 13): 3740,4520
no net on Top Layer "NONET_L01_P007" (solid, pour order 7): 1750,4330
no net on Bottom Layer "NONET_L04_P050" (solid, pour order 50): 1340,4950
GND on Int1 (GND) (split plane): 6979.9,1020.1 1020.1,1020.1 1020.1,4979.9 6979.9,4979.9
VCC on Int2 (PWR) (split plane): 6979.9,1020.1 1020.1,1020.1 1020.1,4979.9 6979.9,4979.9

## Other copper
Top Layer:
  pour cut-out: 3800,4520 4120,4520 4120,4870 3800,4870
  pour cut-out: 2900,4520 3160,4520 3160,4880 2900,4880
  pour cut-out: 1745,4470 2080,4470 2080,4740 1745,4740

## Silkscreen, mask and mechanical layers (free items; w line width, h text height)
Top Overlay:
  drawing of 140 lines, arcs and shapes, not listed
  text "CHASSIS POWER DISTRIBUTION" at 1733,4058 h40
  text "REV 1.1" at 1733,3968 h40
  text "BY: GURTARANJIT KAUR" at 1733,3880.01 h40

## Text inside footprints (layer, text, board x,y; h text height)
U1: Mechanical 13 "TAB" at 1260.25,4104.5 h25
U2: Top Overlay "*" at 4985,4128.94 h50; Mechanical 13 "*" at 5067.5,4123.94 h50
U6: Top Overlay "*" at 3666.22,4128.94 h50; Mechanical 13 "*" at 3748.72,4123.94 h50
U10: Top Overlay "*" at 2111,3380 h50; Mechanical 13 "*" at 2193.5,3385 h50
U14: Top Overlay "16" at 6158.87,3202.35 h19.68 r90; Top Overlay "17" at 6294,3331 h19.68 r90; Top Overlay "32" at 6292,3638 h19.68 r90; Top Overlay "33" at 6160,3774 h19.68 r90; Top Overlay "48" at 5862,3773 h19.68 r90; Top Overlay "49" at 5728,3636 h19.68 r90; Top Overlay "64" at 5728,3335 h19.68 r90